# Allegro board dart_board.brd
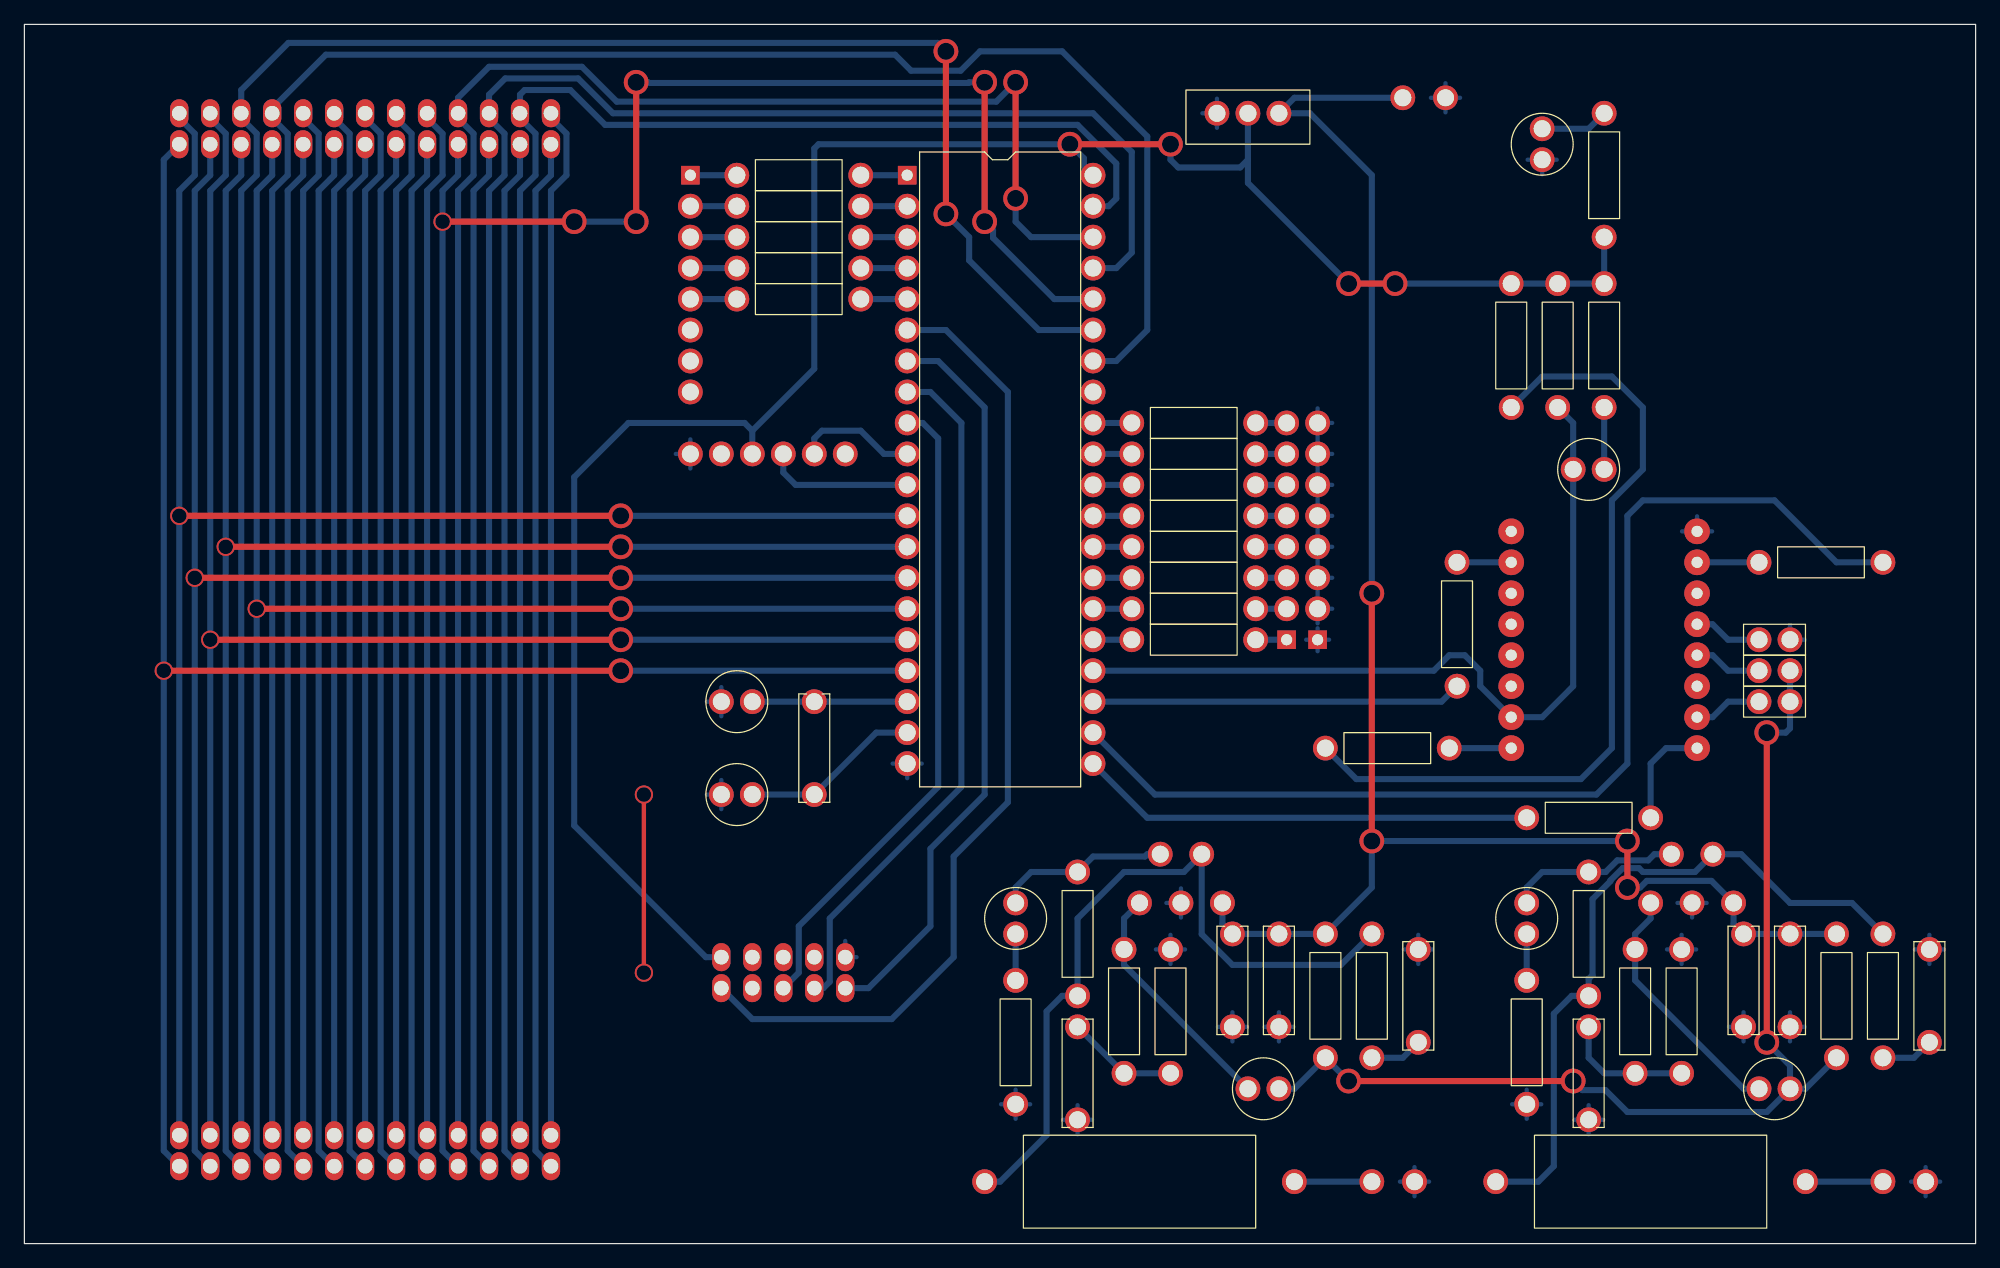
[diagram p0: board, top side]
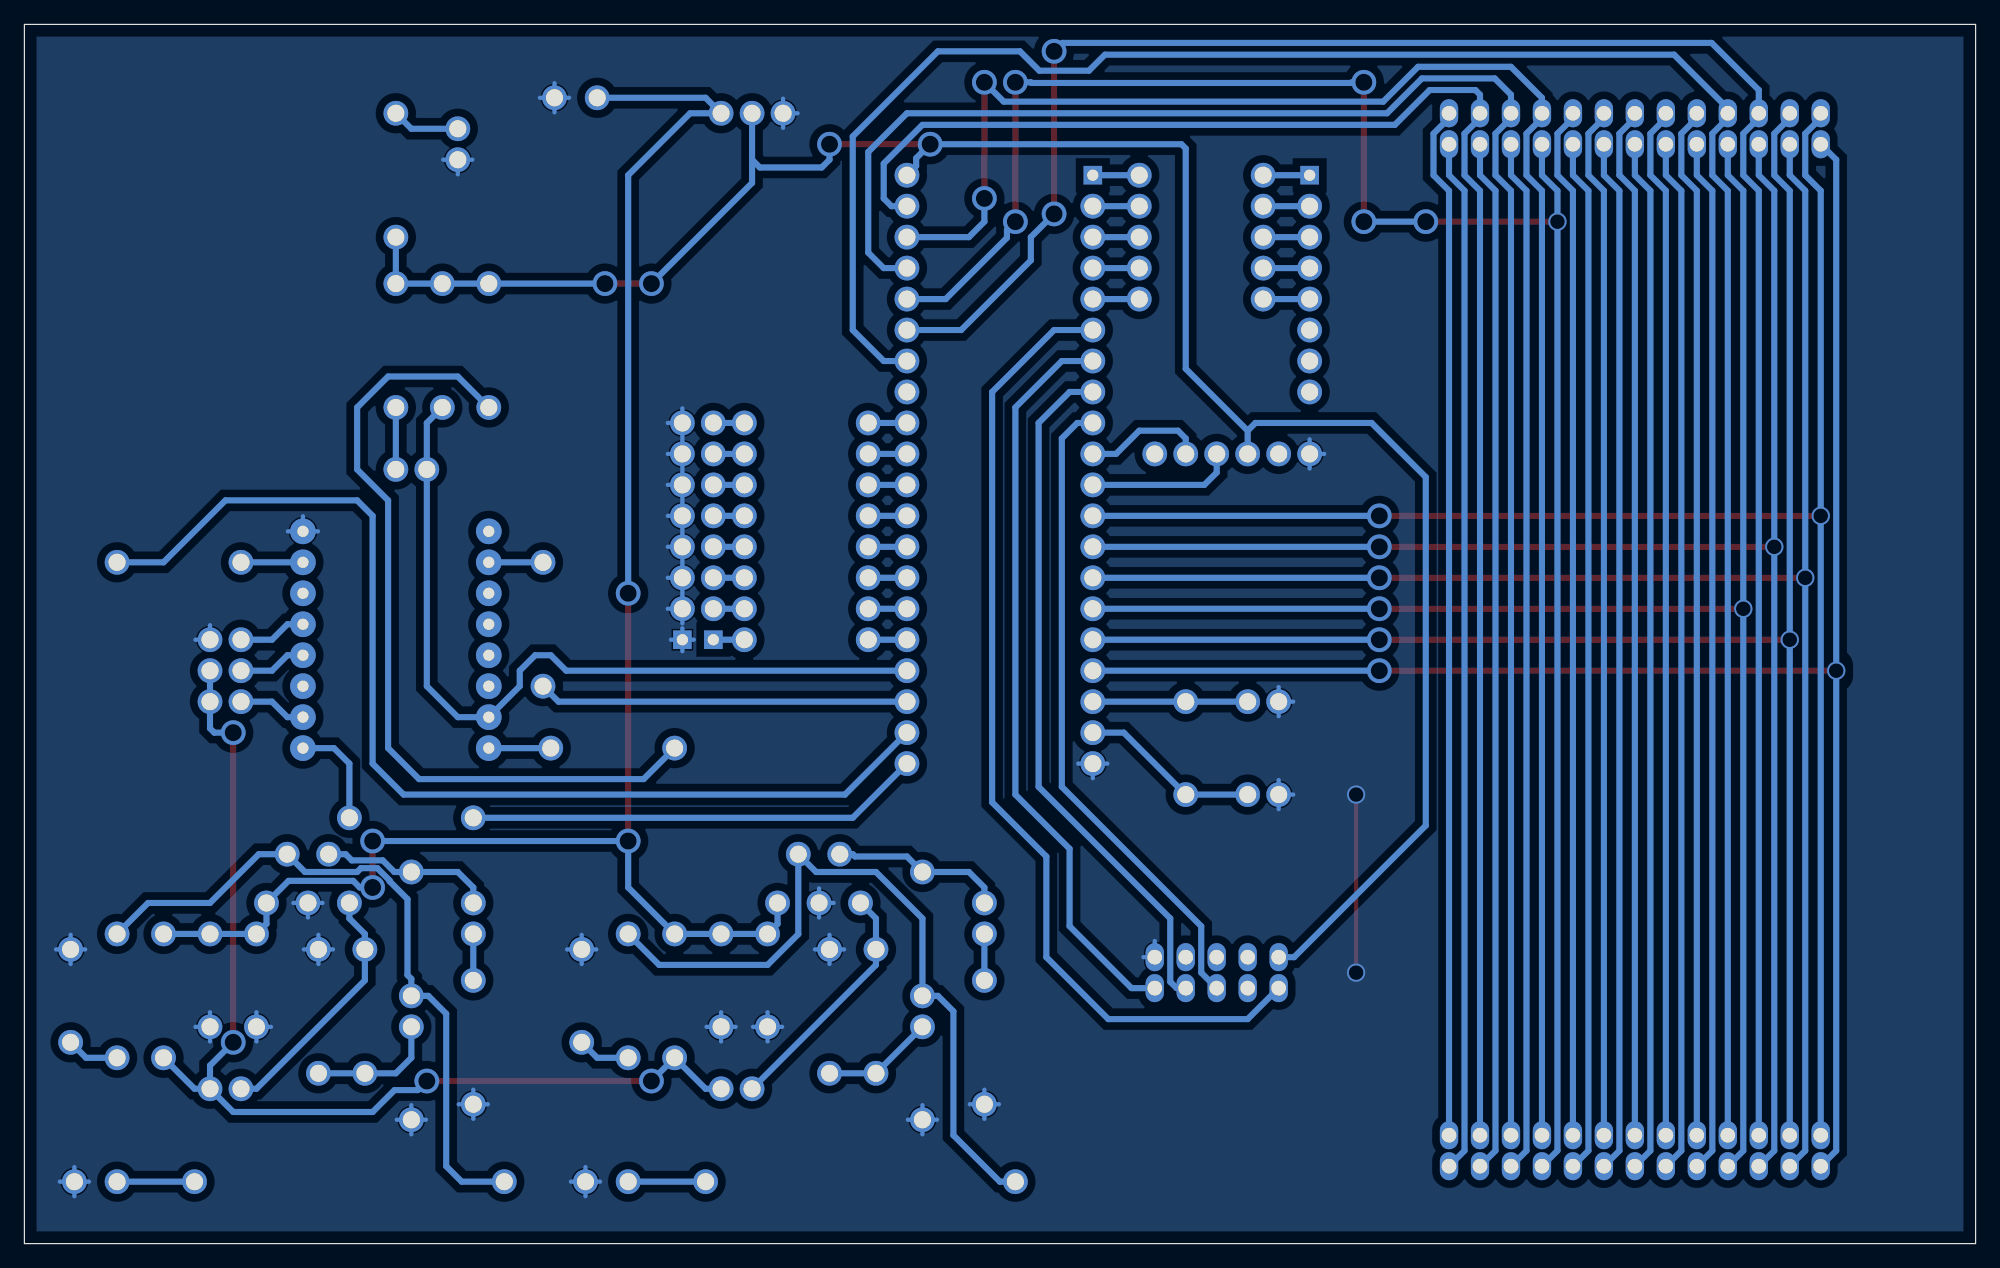
[diagram p1: board, bottom side, seen from below]

Outline 160 x 100 mm; copper layers: TOP, BOTTOM. Coordinates in mm from the lower left corner of the outline.
Outline path: rectangle 0,0 160,100

## Design rules (mm)
nets with their own width: min track width 0.35; nets 0001 0002 0004 0006 0009 0010 0011 0012 0013 0014 0015 0016 0017 0018 501_LEUCHTE 501_TASTE AUDIO_OUT BUSY_AUDIO CLK_AUDIO CLOCK CTS DATA_1 DATA_2 DATA_3 DATA_AUDIO DATA_ENABLE GND GRUENER_DART N02590 N02594 N02604 N02682 N02686 N03089 N03135 N03164 N03171 N03197 N03238 N04301 N04333 N04361 N04369 N04385 N04409 N04912 N04916 N08943 N13574 N13578 N13632 N13685 N13689 N13693 N13697 N13701 N14236 N14243 N14409 N14465 N14524 N20290 N20379 N20819 N20823 N20827 N20831 N20835 N20839 N20843 N20847 N22490 N22929 N22931 N22933 N22935 N22937 N22939 N22941 N22943 PFEIL PLAYER_1 PLAYER_2 PLAYER_3 PLAYER_4 PLAYER_ANZ_TASTE RESET_AUDIO ROTER_DART RTS RUNDENZEICHEN RXD TXD VCC_5V VCC_12V
nets with their own width: min track width 0.5; nets DATA_4

## Placement (name value [footprint] x y rotation side)
C1  2.2uF  [CAP196]  100.33 12.7 270 top
C2  22uF  [CAP300]  86.36 17.78 270 top
C3  220uF  [CAP300]  99.06 25.4 270 top
C4  22uF  [CAP196]  81.28 27.94 180 top
C5  100nF  [CAP300]  102.87 25.4 270 top
C6  100nF  [CAP300]  114.3 16.51 90 top
C7  2200uF  [CAP1000]  78.74 5.08 0 top
C8  2.2uF  [CAP196]  142.24 12.7 270 top
C9  22uF  [CAP300]  128.27 17.78 270 top
C10  220uF  [CAP300]  140.97 25.4 270 top
C11  22uF  [CAP196]  123.19 27.94 180 top
C12  100nF  [CAP300]  144.78 25.4 270 top
C13  100nF  [CAP300]  156.21 16.51 90 top
C14  2200uF  [CAP1000]  120.65 5.08 0 top
C15  CAP NP  [CAP196]  59.69 44.45 90 top
C16  CAP NP  [CAP196]  59.69 36.83 90 top
D1  DIODE  [RES400]  121.92 68.58 0 top
D2  DIODE  [RES400]  116.84 40.64 90 top
D3  LED_Busy_Audio  [CAP196]  127 63.5 270 top
D4  LED  [CAP196]  124.46 88.9 0 top
J1  CON26  [FGCON26]  27.94 91.44 180 top
J2  CON26  [FGCON26]  27.94 7.62 180 top
J3  Output Left  [LPK2]  110.49 5.08 0 top
J4  Output Right  [LPK2]  152.4 5.08 0 top
J5  V_In  [LPK2]  113.03 93.98 0 top
J6  CON6  [FGCON6_1]  59.69 64.77 0 top
J7  CON8  [FGCONN8]  54.61 87.63 180 top
J8  J  [JUMPER2]  144.78 44.45 180 top
J9  J  [JUMPER2]  144.78 46.99 180 top
J10  J  [JUMPER2]  144.78 49.53 180 top
J11  CON8  [FGCONN8]  103.5 49.53 0 top
J12  CON8  [FGCONN8]  106.05 49.53 0 top
J13  CON10  [FGJUMPER10]  62.23 22.23 0 top
R1  22K  [RES400]  106.68 25.4 180 top
R2  20K  [RES400]  93.98 13.97 0 top
R3  22K  [RES400]  90.17 24.13 180 top
R4  680R  [RES400]  81.28 21.59 180 top
R5  22K  [RES400]  86.36 30.48 180 top
R6  4.7R  [RES400]  110.49 25.4 180 top
R7  22K  [RES400]  148.59 25.4 180 top
R8  20K  [RES400]  135.89 13.97 0 top
R9  22K  [RES400]  132.08 24.13 180 top
R10  680R  [RES400]  123.19 21.59 180 top
R11  22K  [RES400]  128.27 30.48 180 top
R12  4.7R  [RES400]  152.4 25.4 180 top
R13  R  [RES400]  58.42 87.63 270 top
R14  R  [RES400]  58.42 85.09 270 top
R15  R  [RES400]  58.42 82.55 270 top
R16  R  [RES400]  58.42 80.01 270 top
R17  R  [RES400]  58.42 77.47 270 top
R21  5K  [RES400]  125.73 78.74 180 top
R22  R  [RES400]  117.47 55.88 180 top
R23  R  [RES400]  152.4 55.88 90 top
R24  R  [RES400]  123.19 34.92 270 top
R25  RESISTOR  [RES400]  129.54 78.74 180 top
R26  RESISTOR  [RES400]  129.54 82.55 0 top
R27  R  [RES400]  90.81 49.53 270 top
R28  R  [RES400]  90.81 52.07 270 top
R29  R  [RES400]  90.81 54.61 270 top
R30  R  [RES400]  90.81 57.15 270 top
R31  R  [RES400]  90.81 59.69 270 top
R32  R  [RES400]  90.81 62.23 270 top
R33  R  [RES400]  90.81 64.77 270 top
R34  R  [RES400]  90.81 67.31 270 top
U1  LM7805/TO  [TO220AB]  102.87 92.71 0 top
U2  -  [TDA2040]  91.44 27.94 0 top
U4  -  [TDA2040]  133.35 27.94 0 top
U5  ATMEGA8515_AU_PDIP  [DIP40_6]  72.39 87.63 0 top
U6  -  [WTV020]  137.16 40.64 90 top
Y1  CRYSTAL  [CAP300]  64.77 44.45 270 top

## Library data of the parts
C1-C4 C7-C11 C14 = CAP: Tolerance: ***; User Part Number: ***
C5 C6 C12 C13 C15 C16 = CAP NP: Tolerance: ***; User Part Number: ***
D1 D2 = DIODE: Tolerance: ***; User Part Number: ***
D3 D4 = LED: Tolerance: ***; User Part Number: ***
J1 J2 = CON26
J3-J5 = CON2
J6 = CON6
J7 J11 J12 = CON8
J8-J10 = JUMPER: User Part Number: ***
J13 = CON10
R1-R17 R21-R34 = RESISTOR: Tolerance: ***; User Part Number: ***
U1 = LM7805/TO
U2 U4 = TDA2040_0
U5 = ATMEGA8515_AU_PDIP: Tolerance: ***; User Part Number: ***
U6 = WTV020
Y1 = CRYSTAL: Tolerance: ***; User Part Number: ***

## Footprints (pads in the part's own frame, mm; a bottom-side part is the same pattern mirrored in y, then rotated)
CAP196
  round 2.032 hole 1.397 unplated: (0,2.54) (0,0)
CAP300
  round 2.032 hole 1.397 unplated: (0,0) (7.62,0)
CAP1000
  round 2.032 hole 1.397 unplated: (0,0) (25.4,0)
DIP40_6
  round 2.032 hole 1.397 unplated: (0,-2.54) (0,-5.08) (0,-7.62) (0,-10.16) (0,-12.7) (0,-15.24) (0,-17.78) (0,-20.32) (0,-22.86) (0,-25.4) (0,-27.94) (0,-30.48) (0,-33.02) (0,-35.56) (0,-38.1) (0,-40.64) (0,-43.18) (0,-45.72) (0,-48.26) (15.24,0) (15.24,-2.54) (15.24,-5.08) (15.24,-7.62) (15.24,-10.16) (15.24,-12.7) (15.24,-15.24) (15.24,-17.78) (15.24,-20.32) (15.24,-22.86) (15.24,-25.4) (15.24,-27.94) (15.24,-30.48) (15.24,-33.02) (15.24,-35.56) (15.24,-38.1) (15.24,-40.64) (15.24,-43.18) (15.24,-45.72) (15.24,-48.26)
  rect 1.524x1.524 hole 0.914: 1(0,0)
FGCON6_1
  round 2.032 hole 1.397 unplated: (-5.08,0) (-2.54,0) (0,0) (2.54,0) (5.08,0) (7.62,0)
FGCON26
  oval 1.5x2.3 hole 1.2: 1(-15.24,-1.27) 2(-15.24,1.27) 3(-12.7,-1.27) 4(-12.7,1.27) 5(-10.16,-1.27) 6(-10.16,1.27) 7(-7.62,-1.27) 8(-7.62,1.27) 9(-5.08,-1.27) 10(-5.08,1.27) 11(-2.54,-1.27) 12(-2.54,1.27) 13(0,-1.27) 14(0,1.27) 15(2.54,-1.27) 16(2.54,1.27) 17(5.08,-1.27) 18(5.08,1.27) 19(7.62,-1.27) 20(7.62,1.27) 21(10.16,-1.27) 22(10.16,1.27) 23(12.7,-1.27) 24(12.7,1.27) 25(15.24,-1.27) 26(15.24,1.27)
FGCONN8
  round 2.032 hole 1.397 unplated: (0,17.78) (0,15.24) (0,12.7) (0,10.16) (0,7.62) (0,5.08) (0,2.54)
  rect 1.524x1.524 hole 0.914: 1(0,0)
FGJUMPER10
  oval 1.5x2.3 hole 1.2: 1(-5.08,-1.27) 2(-5.08,1.27) 3(-2.54,-1.27) 4(-2.54,1.27) 5(0,-1.27) 6(0,1.27) 7(2.54,-1.27) 8(2.54,1.27) 9(5.08,-1.27) 10(5.08,1.27)
JUMPER2
  round 2.032 hole 1.397 unplated: (0,0) (2.54,0)
LPK2
  round 2.032 hole 1.397 unplated: (0,0) (3.5,0)
RES400
  round 2.032 hole 1.397 unplated: (0,10.16) (0,0)
TDA2040
  round 2.032 hole 1.397 unplated: (0,0) (1.7,4) (3.4,0) (5.1,4) (6.8,0)
TO220AB
  round 2.032 hole 1.397 unplated: (-5.08,0) (-2.54,0) (0,0)
WTV020
  round 2.108 hole 0.914: 1(0,0) 2(2.54,0) 3(5.08,0) 4(7.62,0) 5(10.16,0) 6(12.7,0) 7(15.24,0) 8(17.78,0) 9(0,15.24) 10(2.54,15.24) 11(5.08,15.24) 12(7.62,15.24) 13(10.16,15.24) 14(12.7,15.24) 15(15.24,15.24) 16(17.78,15.24)

## Nets
GND: J12.1 J13.10 U6.8(GND)
VCC_5V: J13.2
0001: J1.1 J2.1
0002: J1.2 J2.2
0004: J1.4 J2.4
0006: J1.6 J2.6
0009: J1.9 J2.9
0010: J1.10 J2.10
0011: J1.11 J2.11
0012: J1.12 J2.12
0013: J1.13 J2.13
0014: J1.14 J2.14
0015: J1.15 J2.15
0016: J1.16 J2.16
0017: J1.17 J2.17
0018: J1.18 J2.18
BUSY_AUDIO: U6.10(BUSY)
CLOCK: J1.22 J2.22
DATA_1: J1.3 J2.3
DATA_2: J1.7 J2.7
DATA_3: J1.5 J2.5
DATA_4: J1.8 J2.8
DATA_ENABLE: J1.25 J2.25
GRUENER_DART: U5.1(PB0 (OC0/T0))
PFEIL: J1.21 J2.21
PLAYER_1: J1.24 J2.24
PLAYER_2: J1.20 J2.20
PLAYER_3: J1.23 J2.23
PLAYER_4: J1.26 J2.26
RUNDENZEICHEN: J1.19 J2.19
N02590: U6.1(RESET)
N02594: U6.7(CLK)
N02604: U6.15(DATEN)
N02686: U6.9(+3.3V)
N13574: J13.1
N13578: J13.9
N13632: J13.7
N13685: J7.1
N14409: U6.2(AUDIO)
N14465: U6.4(OUTPUT +)
N14524: U6.5(OUTPUT -)
N22490: J13.5
N22929: J11.1

Pads without a net: J13 3 4 6 8; U6 3 6 11 12 13 14 16

## Via types
v1: diameter 2.032, hole 1.397, TOP to BOTTOM, 27 vias
v2: diameter 1.5, hole 1.2, TOP to BOTTOM, 9 vias

## Routing (per net, layer and track width the routed paths; a pad name or vN(x,y) marks a point on that pad's centre or on a via; arc(x,y) is an arc through that point)
GND: length 149.7
  TOP w0.35: v2(50.8,36.83) v2(50.8,22.23)
  BOTTOM w0.35: 99.06,17.78 100.25,17.78 ; 99.06,17.78 99.06,18.97 ; 99.06,17.78 97.87,17.78 ; 99.06,17.78 99.06,16.59 ; 134.7,24.13 135.89,24.13 ; 135.89,24.13 137.08,24.13 ; 135.89,24.13 135.89,25.32 ; 135.89,24.13 135.89,22.94 ; 144.78,50.72 144.78,49.53 145.97,49.53 ; 94.84,26.75 94.84,27.94 ; 94.84,27.94 93.65,27.94 ; 94.84,27.94 94.84,29.13 ; 139.78,17.78 140.97,17.78 ; 140.97,17.78 140.97,16.59 ; 140.97,17.78 140.97,18.97 ; 155.9,5.08 157.09,5.08 ; 155.9,5.08 154.71,5.08 ; 155.9,5.08 155.9,3.89 ; 155.9,5.08 155.9,6.27 ; 136.75,27.94 137.94,27.94 ; 136.75,27.94 135.56,27.94 ; 136.75,27.94 136.75,26.75 ; 113.99,3.89 113.99,5.08 ; 113.99,5.08 113.99,6.27 ; 113.99,5.08 115.18,5.08 ; 113.99,5.08 112.8,5.08 ; 106.05,52.07 107.24,52.07 ; 106.05,52.07 106.05,50.88 ; 106.05,52.07 106.05,53.26 ; 106.05,61.04 106.05,62.23 ; 106.05,62.23 106.05,63.42 ; 106.05,62.23 107.24,62.23 ; 115.34,93.98 116.53,93.98 ; 116.53,93.98 117.72,93.98 ; 116.53,93.98 116.53,92.79 ; 116.53,93.98 116.53,95.17 ; 86.36,10.16 87.55,10.16 ; 86.36,10.16 86.36,11.35 ; 86.36,10.16 85.17,10.16 ; 86.36,10.16 86.36,8.97 ; 57.15,35.64 57.15,36.83 ; 57.15,36.83 57.15,38.02 ; 57.15,36.83 55.96,36.83 ; U6.8 137.16,59.65 ; U6.8 135.93,58.42 ; U6.8 138.39,58.42 ; 124.46,87.71 124.46,88.9 ; 124.46,88.9 125.65,88.9 ; 124.46,88.9 123.27,88.9 ; 123.19,11.43 123.19,12.62 ; 123.19,11.43 124.38,11.43 ; 123.19,11.43 122,11.43 ; 123.19,11.43 123.19,10.24 ; 114.3,24.13 115.49,24.13 ; 114.3,24.13 114.3,25.32 ; 114.3,24.13 114.3,22.94 ; 114.3,24.13 113.11,24.13 ; 72.39,38.18 72.39,39.37 ; 72.39,39.37 71.2,39.37 ; 72.39,39.37 73.58,39.37 ; 93.98,24.13 93.98,25.32 ; 93.98,24.13 95.17,24.13 ; 93.98,24.13 92.79,24.13 ; 93.98,24.13 93.98,22.94 ; 106.05,64.77 107.24,64.77 ; 106.05,64.77 106.05,63.58 ; 106.05,64.77 106.05,65.96 ; 128.27,8.97 128.27,10.16 ; 128.27,10.16 127.08,10.16 ; 128.27,10.16 129.46,10.16 ; 128.27,10.16 128.27,11.35 ; 106.05,67.31 106.05,68.5 ; 106.05,67.31 107.24,67.31 ; 106.05,67.31 106.05,66.12 ; 105.11,49.53 J12.1 ; J12.1 106.98,49.53 ; J12.1 106.05,50.47 ; J12.1 106.05,48.59 ; 106.05,57.15 106.05,58.34 ; 106.05,57.15 107.24,57.15 ; 106.05,57.15 106.05,55.96 ; 81.28,11.43 81.28,12.62 ; 81.28,11.43 80.09,11.43 ; 81.28,11.43 82.47,11.43 ; 81.28,11.43 81.28,10.24 ; 106.05,59.69 106.05,60.88 ; 106.05,59.69 106.05,58.5 ; 106.05,59.69 107.24,59.69 ; 97.79,91.52 97.79,92.71 ; 97.79,92.71 97.79,93.9 ; 97.79,92.71 96.6,92.71 ; 102.87,17.78 104.06,17.78 ; 102.87,17.78 102.87,18.97 ; 102.87,17.78 101.68,17.78 ; 102.87,17.78 102.87,16.59 ; 55.96,44.45 57.15,44.45 ; 57.15,44.45 57.15,45.64 ; 57.15,44.45 57.15,43.26 ; 106.05,54.61 107.24,54.61 ; 106.05,54.61 106.05,55.8 ; 106.05,54.61 106.05,53.42 ; 54.61,64.77 54.61,65.96 ; 54.61,64.77 53.42,64.77 ; 54.61,64.77 54.61,63.58 ; 144.78,17.78 144.78,18.97 ; 144.78,17.78 144.78,16.59 ; 144.78,17.78 145.97,17.78 ; 156.21,22.94 156.21,24.13 ; 156.21,24.13 155.02,24.13 ; 156.21,24.13 156.21,25.32 ; 156.21,24.13 157.4,24.13 ; 67.31,24.82 J13.10 68.24,23.5
VCC_5V: length 172
  TOP w0.5: v1(93.98,90.17) v1(85.72,90.17) ; v1(108.58,78.74) v1(112.39,78.74)
  BOTTOM w0.5: 59.69,64.77 59.69,66.67 ; 59.69,66.67 59.05,67.31 49.53,67.31 45.09,62.87 45.09,34.29 55.88,23.5 J13.2 ; 59.69,66.67 64.77,71.75 64.77,89.82 65.12,90.17 v1(85.72,90.17) 86.88,89.02 86.88,88.38 87.63,87.63 ; 100.33,88.9 100.33,87 v1(108.58,78.74) ; 100.33,88.9 100.33,92.71 ; 100.33,88.9 99.69,88.27 94.61,88.27 93.98,88.9 v1(93.98,90.17) ; 129.54,82.55 129.54,78.74 v1(112.39,78.74)
VCC_12V: length 139.7
  TOP w0.5: v1(110.49,53.34) v1(110.49,33.02) ; v1(131.44,33.02) v1(131.44,29.21)
  BOTTOM w0.5: v1(110.49,53.34) 110.49,87.63 105.41,92.71 102.87,92.71 104.14,93.98 113.03,93.98 ; 98.24,27.94 98.24,26.22 99.06,25.4 106.68,25.4 110.49,29.21 v1(110.49,33.02) v1(131.44,33.02) ; v1(131.44,29.21) 132.5,29.21 133.04,29.75 138.34,29.75 140.15,27.94 140.15,26.22 140.97,25.4 148.59,25.4
0001: length 84.9
  BOTTOM w0.5: J1.1 43.18,92.31 44.45,91.04 44.45,87.63 43.18,86.36 J2.1
0002: length 84.9
  BOTTOM w0.5: J1.2 43.18,87.63 41.91,86.36 41.91,7.62 J2.2
0004: length 84.9
  BOTTOM w0.5: J1.4 40.64,87.63 39.37,86.36 39.37,7.62 J2.4
0006: length 84.9
  BOTTOM w0.5: J2.6 36.83,7.62 36.83,86.36 38.1,87.63 J1.6
0009: length 84.9
  BOTTOM w0.5: J2.9 33.02,86.36 34.29,87.63 34.29,91.04 33.02,92.31 J1.9
0010: length 84.9
  BOTTOM w0.5: J2.10 31.75,7.62 31.75,86.36 33.02,87.63 J1.10
0011: length 84.9
  BOTTOM w0.5: J2.11 30.48,86.36 31.75,87.63 31.75,91.04 30.48,92.31 J1.11
0012: length 84.9
  BOTTOM w0.5: J2.12 29.21,7.62 29.21,86.36 30.48,87.63 J1.12
0013: length 84.9
  BOTTOM w0.5: J1.13 27.94,92.31 29.21,91.04 29.21,87.63 27.94,86.36 J2.13
0014: length 84.9
  BOTTOM w0.5: J2.14 26.67,7.62 26.67,86.36 27.94,87.63 J1.14
0015: length 84.9
  BOTTOM w0.5: J2.15 25.4,86.36 26.67,87.63 26.67,91.04 25.4,92.31 J1.15
0016: length 84.9
  BOTTOM w0.5: J2.16 24.13,7.62 24.13,86.36 25.4,87.63 J1.16
0017: length 84.9
  BOTTOM w0.5: J2.17 22.86,86.36 24.13,87.63 24.13,91.04 22.86,92.31 J1.17
0018: length 84.9
  BOTTOM w0.5: J1.18 22.86,87.63 21.59,86.36 21.59,7.62 J2.18
501_LEUCHTE: length 3.8
  BOTTOM w0.5: 68.58,80.01 72.39,80.01
501_TASTE: length 3.8
  BOTTOM w0.5: 68.58,82.55 72.39,82.55
AUDIO_OUT: length 87.2
  TOP w0.5: v1(108.58,13.34) v1(127,13.34) ; v1(142.88,16.51) v1(142.88,41.91)
  BOTTOM w0.5: 144.78,12.7 144.78,14.61 v1(142.88,16.51) ; 144.78,12.7 146.05,12.7 148.59,15.24 ; 144.78,12.7 142.88,10.79 131.44,10.79 129.65,12.59 127.74,12.59 v1(127,13.34) ; 144.78,46.99 144.78,42.26 144.43,41.91 v1(142.88,41.91) ; 102.87,12.7 104.14,12.7 106.68,15.24 v1(108.58,13.34)
BUSY_AUDIO: length 67.2
  BOTTOM w0.5: 125.73,68.58 127,67.31 127,45.72 124.46,43.18 U6.10 119.38,45.72 119.38,46.99 118.11,48.26 116.84,48.26 115.57,46.99 87.63,46.99
CLK_AUDIO: length 90.9
  BOTTOM w0.5: 87.63,41.91 92.71,36.83 128.91,36.83 131.44,39.37 131.44,59.69 132.72,60.96 143.51,60.96 148.59,55.88 152.4,55.88
CLOCK: length 140.8
  TOP w0.5: v1(48.9,57.15) v2(16.51,57.15)
  BOTTOM w0.5: 72.39,57.15 v1(48.9,57.15) ; J1.22 17.78,87.63 16.51,86.36 v2(16.51,57.15) 16.51,7.62 J2.22
DATA_1: length 143
  BOTTOM w0.5: J2.3 40.64,86.36 41.91,87.63 41.91,91.04 40.64,92.31 J1.3 40.64,94.24 41.02,94.61 44.77,94.61 47.62,91.76 86.36,91.76 89.53,88.58 89.53,85.72 88.9,85.09 87.63,85.09
DATA_2: length 153.1
  TOP w0.5: v1(81.28,95.25) v1(81.28,85.72)
  BOTTOM w0.5: v1(81.28,95.25) 79.69,93.66 48.58,93.66 45.72,96.52 38.1,96.52 35.56,93.98 J1.7 35.56,92.31 36.83,91.04 36.83,87.63 35.56,86.36 J2.7 ; 87.63,82.55 82.55,82.55 81.28,83.82 v1(81.28,85.72)
DATA_3: length 154.1
  BOTTOM w0.5: 87.63,80.01 89.53,80.01 90.81,81.28 90.81,89.53 87.63,92.71 48.26,92.71 45.4,95.57 39.43,95.57 38.1,94.24 J1.5 38.1,92.31 39.37,91.04 39.37,87.63 38.1,86.36 J2.5
DATA_4: length 164.1
  TOP w0.5: v1(45.09,83.82) v2(34.29,83.82) ; v1(78.74,83.82) v1(78.74,95.25) ; v1(50.16,95.25) v1(50.16,83.82)
  BOTTOM w0.5: v1(78.74,83.82) 79.43,83.13 79.43,82.5 84.45,77.47 87.63,77.47 ; v1(50.16,95.25) 51.14,95.25 51.2,95.2 77.42,95.2 77.47,95.25 v1(78.74,95.25) ; J2.8 34.29,7.62 v2(34.29,83.82) 34.29,86.36 35.56,87.63 J1.8 ; v1(50.16,83.82) v1(45.09,83.82)
DATA_AUDIO: length 30.4
  BOTTOM w0.5: 117.47,45.72 116.2,44.45 87.63,44.45
DATA_ENABLE: length 144.6
  TOP w0.5: v1(48.9,59.69) v2(12.7,59.69)
  BOTTOM w0.5: 72.39,59.69 v1(48.9,59.69) ; J1.25 12.7,92.31 13.97,91.04 13.97,87.63 12.7,86.36 v2(12.7,59.69) J2.25
GRUENER_DART: length 3.8
  BOTTOM w0.5: 68.58,87.63 U5.1
PFEIL: length 176.9
  TOP w0.5: v1(75.56,97.79) v1(75.56,84.45)
  BOTTOM w0.5: J2.21 17.78,86.36 19.05,87.63 19.05,91.04 17.78,92.31 J1.21 17.78,94.61 21.64,98.48 74.88,98.48 v1(75.56,97.79) ; v1(75.56,84.45) 77.47,82.55 77.47,80.64 83.19,74.93 87.63,74.93
PLAYER_1: length 143.3
  TOP w0.5: v1(48.9,54.61) v2(13.97,54.61)
  BOTTOM w0.5: J1.24 15.24,87.63 13.97,86.36 v2(13.97,54.61) 13.97,7.62 J2.24 ; 72.39,54.61 v1(48.9,54.61)
PLAYER_2: length 138.2
  TOP w0.5: v1(48.9,52.07) v2(19.05,52.07)
  BOTTOM w0.5: J1.20 20.32,87.63 19.05,86.36 v2(19.05,52.07) 19.05,7.62 J2.20 ; 72.39,52.07 v1(48.9,52.07)
PLAYER_3: length 142
  TOP w0.5: v1(48.9,49.53) v2(15.24,49.53)
  BOTTOM w0.5: 72.39,49.53 v1(48.9,49.53) ; J2.23 v2(15.24,49.53) 15.24,86.36 16.51,87.63 16.51,91.04 15.24,92.31 J1.23
PLAYER_4: length 145.8
  TOP w0.5: v1(48.9,46.99) v2(11.43,46.99)
  BOTTOM w0.5: J2.26 11.43,7.62 v2(11.43,46.99) 11.43,88.9 J1.26 ; 72.39,46.99 v1(48.9,46.99)
PLAYER_ANZ_TASTE: length 3.8
  BOTTOM w0.5: 68.58,77.47 72.39,77.47
RESET_AUDIO: length 37.4
  BOTTOM w0.5: 123.19,34.92 92.08,34.92 87.63,39.37
ROTER_DART: length 3.8
  BOTTOM w0.5: 68.58,85.09 72.39,85.09
RUNDENZEICHEN: length 184.3
  BOTTOM w0.5: J2.19 20.32,86.36 21.59,87.63 21.59,91.04 20.32,92.31 J1.19 20.32,93.11 24.72,97.51 71.4,97.51 72.71,96.2 76.77,96.2 78.36,97.79 85.09,97.79 92.08,90.81 92.08,74.93 89.53,72.39 87.63,72.39
RXD: length 9.9
  BOTTOM w0.5: 72.39,64.77 70.48,64.77 68.58,66.67 65.41,66.67 64.77,66.04 64.77,64.77
TXD: length 12.1
  BOTTOM w0.5: 72.39,62.23 63.24,62.23 62.23,63.24 62.23,64.77
N02590: length 8.8
  BOTTOM w0.5: 133.35,34.92 133.35,39.37 134.62,40.64 U6.1
N02594: length 5.1
  BOTTOM w0.5: 142.24,55.88 U6.7
N02604: length 4.4
  BOTTOM w0.5: 117.47,55.88 U6.15
N02682: length 67.5
  BOTTOM w0.5: 121.92,68.58 124.46,71.12 130.18,71.12 132.72,68.58 132.72,63.5 130.18,60.96 130.18,40.64 127.64,38.1 109.22,38.1 106.68,40.64
N02686: length 5.1
  BOTTOM w0.5: 116.84,40.64 U6.9
N03089: length 20
  BOTTOM w0.5: 100.33,12.7 90.17,22.86 90.17,26.67 91.44,27.94
N03135: length 9.2
  BOTTOM w0.5: 86.36,17.78 90.17,13.97 93.98,13.97
N03164: length 14.3
  BOTTOM w0.5: 81.28,27.94 81.28,29.21 82.55,30.48 86.36,30.48 87.63,31.75 91.89,31.75 92.08,31.94 93.14,31.94
N03171: length 61.2
  BOTTOM w0.5: 78.74,5.08 80.01,5.08 83.82,8.89 83.82,19.05 85.09,20.32 86.36,20.32 86.36,26.67 90.17,30.48 95.08,30.48 96.54,31.94 96.54,25.38 99.06,22.86 107.95,22.86 110.49,25.4
N03197: length 3.8
  BOTTOM w0.5: 81.28,25.4 81.28,21.59
N03238: length 4.3
  BOTTOM w0.5: 114.3,16.51 113.03,15.24 110.49,15.24
N04301: length 20.7
  BOTTOM w0.5: 142.24,12.7 140.97,12.7 132.08,21.59 132.08,25.4 133.35,26.67 133.35,27.94
N04333: length 10.7
  BOTTOM w0.5: 128.27,17.78 128.27,15.24 129.54,13.97 135.89,13.97
N04361: length 14.3
  BOTTOM w0.5: 123.19,27.94 123.19,29.21 124.46,30.48 129.66,30.48 130.62,31.43 133.15,31.43 133.66,31.94 135.05,31.94
N04369: length 57.7
  BOTTOM w0.5: 120.65,5.08 124.14,5.08 125.41,6.35 125.41,18.86 126.88,20.32 128.27,20.32 128.27,21.71 128.59,22.03 128.59,28.26 130.05,29.72 130.05,29.79 131.06,30.8 132.4,30.8 132.72,30.48 136.99,30.48 138.45,31.94 140.78,31.94 144.78,27.94 149.86,27.94 152.4,25.4
N04385: length 3.8
  BOTTOM w0.5: 123.19,25.4 123.19,21.59
N04409: length 4.3
  BOTTOM w0.5: 152.4,15.24 154.94,15.24 156.21,16.51
N04912: length 6.3
  BOTTOM w0.5: 104.14,5.08 110.49,5.08
N04916: length 6.3
  BOTTOM w0.5: 152.4,5.08 146.05,5.08
N13574: length 80.8
  BOTTOM w0.5: 72.39,74.93 75.56,74.93 80.64,69.85 80.64,36.2 76.2,31.75 76.2,23.5 71.12,18.41 59.69,18.41 J13.1
N13578: length 61.4
  BOTTOM w0.5: J13.9 69.22,20.95 74.3,26.04 74.3,32.38 78.74,36.83 78.74,68.58 74.93,72.39 72.39,72.39
N13632: length 57.3
  BOTTOM w0.5: J13.7 65.52,20.95 66.04,21.48 66.04,26.67 76.83,37.47 76.83,67.31 74.3,69.85 72.39,69.85
N13685: length 3.8
  BOTTOM w0.5: J7.1 58.42,87.63
N13689: length 3.8
  BOTTOM w0.5: 54.61,85.09 58.42,85.09
N13693: length 3.8
  BOTTOM w0.5: 54.61,82.55 58.42,82.55
N13697: length 3.8
  BOTTOM w0.5: 54.61,80.01 58.42,80.01
N13701: length 3.8
  BOTTOM w0.5: 54.61,77.47 58.42,77.47
N14236: length 12.7
  BOTTOM w0.5: 59.69,44.45 72.39,44.45
N14243: length 14.8
  BOTTOM w0.5: 72.39,41.91 69.85,41.91 64.77,36.83 59.69,36.83
N14409: length 5.6
  BOTTOM w0.5: U6.2 138.43,43.18 139.7,44.45 142.24,44.45
N14465: length 5.6
  BOTTOM w0.5: 142.24,46.99 139.7,46.99 138.43,48.26 U6.4
N14524: length 5.6
  BOTTOM w0.5: 142.24,49.53 139.7,49.53 138.43,50.8 U6.5
N20290: length 5.1
  BOTTOM w0.5: 129.54,63.5 129.54,68.58
N20379: length 5.6
  BOTTOM w0.5: 124.46,91.44 128.27,91.44 129.54,92.71
N20819: length 3.2
  BOTTOM w0.5: 87.63,49.53 90.81,49.53
N20823: length 3.2
  BOTTOM w0.5: 87.63,52.07 90.81,52.07
N20827: length 3.2
  BOTTOM w0.5: 87.63,54.61 90.81,54.61
N20831: length 3.2
  BOTTOM w0.5: 87.63,57.15 90.81,57.15
N20835: length 3.2
  BOTTOM w0.5: 87.63,59.69 90.81,59.69
N20839: length 3.2
  BOTTOM w0.5: 87.63,62.23 90.81,62.23
N20843: length 3.2
  BOTTOM w0.5: 87.63,64.77 90.81,64.77
N20847: length 3.2
  BOTTOM w0.5: 87.63,67.31 90.81,67.31
N22490: length 53.4
  BOTTOM w0.5: J13.5 63.5,22.23 63.5,26.04 74.93,37.47 74.93,66.04 73.66,67.31 72.39,67.31
N22929: length 2.5
  BOTTOM w0.5: 100.97,49.53 J11.1
N22931: length 2.5
  BOTTOM w0.5: 100.97,52.07 103.5,52.07
N22933: length 2.5
  BOTTOM w0.5: 100.97,54.61 103.5,54.61
N22935: length 2.5
  BOTTOM w0.5: 100.97,57.15 103.5,57.15
N22937: length 2.5
  BOTTOM w0.5: 100.97,59.69 103.5,59.69
N22939: length 2.5
  BOTTOM w0.5: 100.97,62.23 103.5,62.23
N22941: length 2.5
  BOTTOM w0.5: 100.97,64.77 103.5,64.77
N22943: length 2.5
  BOTTOM w0.5: 100.97,67.31 103.5,67.31

## Copper pours and planes (outline as drawn; the poured copper is in the pictures)
GND on BOTTOM: 1,1 1,99 159,99 159,1
